# Allegro board MainBoard.brd
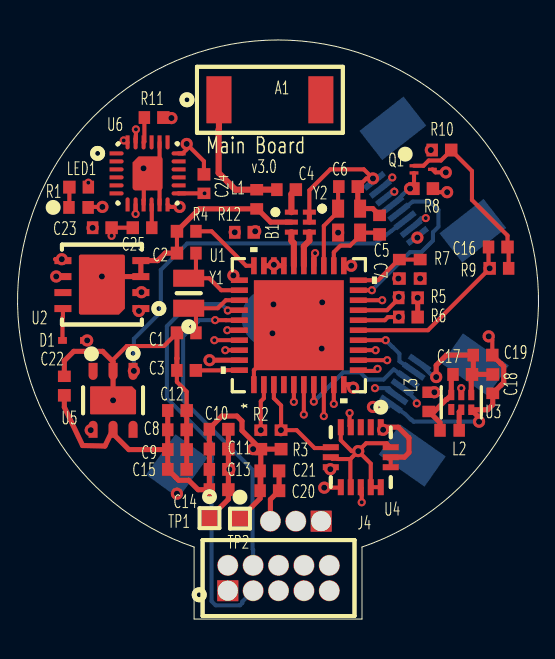
[diagram p0: board, top side]
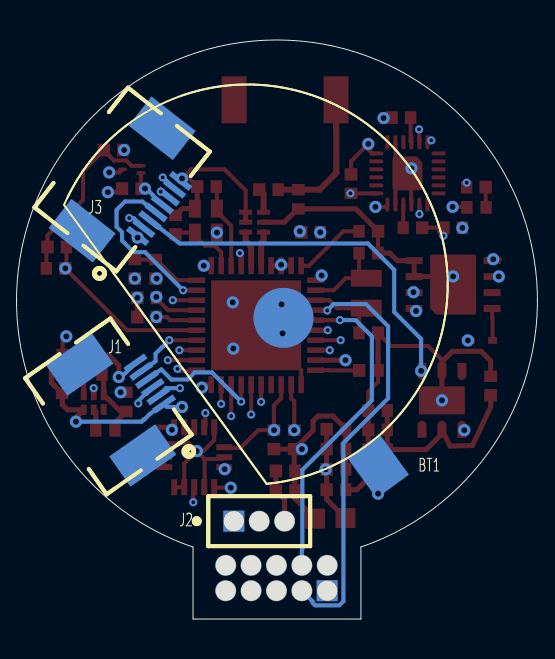
[diagram p1: board, bottom side, seen from below]

Outline 26.07 x 28.97 mm; copper layers: TOP, GND, SIGNAL1, SIGNAL2, POWER, BOTTOM. Coordinates in mm from the lower left corner of the outline.
Outline path: 8.83,3.6 8.83,0 17.23,0 17.23,3.6 arc(13.03,28.97) 8.83,3.6

## Placement (name value [footprint] x y rotation side)
A1  AN_SMD  [FR05_S1_N_0_102]  12.62 25.98 0 top
B1  Balun_LFB182G45BG2D280  [LFB182G45BG2D280]  14.15 19.86 0 top
BT1  -  [CR2032]  14.55 16.71 54 bottom
C1  22pF  [C0402]  8.43 14.32 180 top
C2  22pF  [C0402]  8.43 18.31 180 top
C3  1uF  [C0402]  8.46 12.44 0 top
C4  1.2pF_GRM1555C1H1R2CZ01D1  [C0402]  13.46 21.48 0 top
C5  12pF  [C0402]  18.11 19.7 270 top
C6  12pF  [C0402]  16.56 21.63 0 top
C7  1nF  [C0402]  19.1 17.49 270 top
C8  100nF  [C0402]  8 9.47 0 top
C9  100nF  [C0402]  8 8.48 0 top
C10  100nF  [C0402]  10.08 9.49 0 top
C11  100nF  [C0402]  10.08 8.5 0 top
C12  200pF  [C0402]  8 10.43 0 top
C13  2.2uF  [C0402]  10.08 7.49 0 top
C14  1uF  [C0402]  10.08 6.47 0 top
C15  100nF  [C0402]  8 7.49 0 top
C16  100pF  [C0402]  24.05 18.61 0 top
C17  2.2uF  [C0402]  22.28 12.24 0 top
C18  1210  [C0402]  23.77 11.78 90 top
C19  2.2uF  [C0402]  23.29 13.2 0 top
C20  CAP NP  [C0402]  12.62 6.42 0 top
C21  CAP POL  [C0402]  12.62 7.41 0 top
C22  100NF_25V_GRM155R71E103KA01D  [C0402]  2.34 11.65 270 top
C23  0.1uF+-10%,4V  [C0402]  4.24 19.58 0 top
C24  10nF+-10%,4V  [C0402]  9.32 21.79 90 top
C25  0.1uF+-10%,2V  [C0402]  6.22 19.58 180 top
D1  1N60P_LL34  [NSVR0230P2]  2.79 13.94 180 top
J1  SIM800_PORTS  [FPC_6PIN_0_5MM]  21.46 10.64 325 bottom
J2  UART  [HEADER1X3]  15.19 4.9 180 bottom
J3  SkinClosed_Ports  [FPC_8PIN_0_5MM]  20.78 21.99 38 bottom
J4  CC_Debugger  [HEADER_2X5_6]  10.52 1.42 0 top
L1  ? nH  [L0402]  11.96 21 90 top
L2  2.2uH  [L0402]  21.62 9.44 180 top
L3  LBead_BLM15HG102SN1D  [L0402]  20.57 10.86 90 top
LED1  RED  [LED0402]  3.05 20.59 0 top
NOREF  -  []  26.06 16.15 0 top
Q1  MMBT3904SL-SOT-923  [SOT923]  20.29 22.5 0 top
R1  330R  [R0402]  3.05 21.61 180 top
R2  2K2  [R0402]  12.17 8.96 270 top
R3  2K2  [R0402]  13.18 8.96 270 top
R4  56K-1%  [R0402]  8.43 19.4 180 top
R5  4.7K  [R0402]  19.56 16.07 0 top
R6  4.7K  [R0402]  19.56 15.11 0 top
R7  2K7  [R0402]  20.14 17.49 270 top
R8  20K  [R0402]  20.32 21.53 0 top
R9  4.7K  [R0402]  24.08 17.54 180 top
R10  47K  [R0402]  21.23 23.46 0 top
R11  0R  [R0402]  6.83 25.09 0 top
R12  0R  [R0402]  11.35 19.35 0 top
TP1  TP  [TP1]  9.6 5.05 0 top
TP2  TP  [TP1]  11.12 5.02 0 top
U1  CC2541-VQFN  [RHA40_4P5X4P5]  14.07 14.7 90 top
U2  MX25U1635EZUI-10G  [MX25U1635EZUI]  4.22 16.73 180 top
U3  TPS62730  [DRY6]  22.2 10.84 90 top
U4  -  [LIS3DH]  17.17 8.1 270 top
U5  -  [SHT25]  4.77 10.94 270 top
U6  -  [MPU6500]  6.5 22.29 0 top
Y1  32.768KHz  [Y_FC_12M]  8.56 16.3 90 top
Y2  32MHz  [FA-118T]  16.59 19.93 0 top

## Library data of the parts
A1 = AN_SMD_1
B1 = Balun_LFB182G45BG2D280
BT1 = BATTERY
C1-C16 = CAP-NP
C17 C19 C20 C22-C25 = CAP NP
C18 = CAP-POL
C21 = CAP POL
D1 = DIODE
J1 = HEADER 6
J2 = HEADER 3
J3 = HEADER 8
J4 = CC_Debugger
L1 L2 = L
L3 = BEAD
LED1 = LED
Q1 = NPN
R1-R12 = R
TP1 TP2 = TP
U1 = CC2541
U2 = MX25U1635EZUI-10G_0
U3 = TPS62730
U4 = LIS3DH
U5 = SHT25_0
U6 = MPU6500_0
Y1 = Crystal_2PIN
Y2 = Crystal_4PIN_US

## Footprints (pads in the part's own frame, mm; a bottom-side part is the same pattern mirrored in y, then rotated)
C0402
  rect 0.57x0.64 smd: 1(-0.49,0)
  rect 0.62x0.64 smd: 2(0.46,0)
CR2032
  rect 2.5x2 smd: 1(-11.2,0)
  round 3 smd: 2(-2.413,-0.533)
DRY6
  rect 0.55x0.3 smd: 1(-0.355,0.5)
  rect 0.52x0.3 smd: 2(-0.37,0) 3(-0.37,-0.5) 4(0.37,-0.5) 5(0.37,0) 6(0.37,0.5)
FA-118T
  rect 0.6x0.9 smd: 1(-0.55,0.6) 2(-0.55,-0.6) 3(0.55,-0.6) 4(0.55,0.6)
FPC_6PIN_0_5MM
  rect 2.8x1.85 smd: (-0.025,-2.54) (0,2.997)
  rect 1.25x0.3 smd: 1(-2.35,1.5) 2(-2.35,1) 3(-2.35,0.5) 4(-2.35,0) 5(-2.35,-0.5) 6(-2.35,-1)
FPC_8PIN_0_5MM
  rect 2.8x1.85 smd: (0,-3.251) (0,3.251)
  rect 1.25x0.3 smd: 1(-2.35,1.75) 2(-2.35,1.25) 3(-2.35,0.75) 4(-2.35,0.25) 5(-2.35,-0.25) 6(-2.35,-0.75) 7(-2.35,-1.25) 8(-2.35,-1.75)
FR05_S1_N_0_102
  rect 1.25x2.35 smd: 1(-2.55,0) 2(2.55,0)
HEADER1X3
  rect 1.05x1.05 hole 1: 1(0,0)
  round 1.05 hole 1: 2(1.27,0) 3(2.54,0)
HEADER_2X5_6
  rect 1.05x1.05 hole 1: 1(0,0)
  round 1.05 hole 1: 2(0,1.27) 3(1.27,0) 4(1.27,1.27) 5(2.54,0) 6(2.54,1.27) 7(3.81,0) 8(3.81,1.27) 9(5.08,0) 10(5.08,1.27)
L0402
  rect 0.57x0.64 smd: 1(-0.48,0) 2(0.48,0)
LED0402
  rect 0.57x0.64 smd: 1(-0.48,0) 2(0.48,0)
LFB182G45BG2D280
  rect 0.65x0.25 smd: 1(-0.45,0.5) 2(-0.45,0) 3(-0.45,-0.5) 4(0.45,-0.5) 5(0.45,0) 6(0.45,0.5)
LIS3DH
  rect 0.8x0.3 smd: 1(-1.5,1) 2(-1.5,0.5) 3(-1.5,0) 4(-1.5,-0.5) 5(-1.5,-1) 9(1.5,-1) 10(1.5,-0.5) 11(1.5,0) 12(1.5,0.5) 13(1.5,1)
  rect 0.3x0.8 smd: 6(-0.5,-1.5) 7(0,-1.5) 8(0.5,-1.5) 14(0.5,1.5) 15(0,1.5) 16(-0.5,1.5)
MPU6500
  custom 0.7x0.2 smd: 1(-1.55,1) 2(-1.55,0.6) 3(-1.55,0.2) 4(-1.55,-0.2) 5(-1.55,-0.6) 6(-1.55,-1) 13(1.55,-1) 14(1.55,-0.6) 15(1.55,-0.2) 16(1.55,0.2) 17(1.55,0.6) 18(1.55,1)
  custom 0.2x0.7 smd: 7(-1,-1.55) 8(-0.6,-1.55) 9(-0.2,-1.55) 10(0.2,-1.55) 11(0.6,-1.55) 12(1,-1.55) 19(1,1.55) 20(0.6,1.55) 21(0.2,1.55) 22(-0.2,1.55) 23(-0.6,1.55) 24(-1,1.55)
  custom 1.5x1.7 smd: 25(0,0)
MX25U1635EZUI
  rect 0.85x0.35 smd: 1(-1.95,1.2) 2(-1.95,0.4) 3(-1.95,-0.4) 4(-1.95,-1.2) 5(1.95,-1.2) 6(1.95,-0.4) 7(1.95,0.4) 8(1.95,1.2)
  custom 2.3x3 smd: 9(0,0)
NSVR0230P2
  rect 0.44x0.34 smd: 1(-0.55,0) 2(0.55,0)
R0402
  rect 0.57x0.64 smd: 1(-0.49,0)
  rect 0.62x0.64 smd: 2(0.46,0)
RHA40_4P5X4P5
  rect 0.85x0.28 smd: 1(-2.975,2.25) 2(-2.975,1.75) 3(-2.975,1.25) 4(-2.975,0.75) 5(-2.975,0.25) 6(-2.975,-0.25) 7(-2.975,-0.75) 8(-2.975,-1.25) 9(-2.975,-1.75) 10(-2.975,-2.25) 21(2.975,-2.25) 22(2.975,-1.75) 23(2.975,-1.25) 24(2.975,-0.75) 25(2.975,-0.25) 26(2.975,0.25) 27(2.975,0.75) 28(2.975,1.25) 29(2.975,1.75) 30(2.975,2.25)
  rect 0.28x0.85 smd: 11(-2.25,-2.975) 12(-1.751,-2.975) 13(-1.25,-2.975) 14(-0.75,-2.975) 15(-0.25,-2.975) 16(0.25,-2.975) 17(0.75,-2.975) 18(1.25,-2.975) 19(1.751,-2.975) 20(2.25,-2.975) 31(2.25,2.975) 32(1.751,2.975) 33(1.25,2.975) 34(0.75,2.975) 35(0.25,2.975) 36(-0.25,2.975) 37(-0.75,2.975) 38(-1.25,2.975) 39(-1.751,2.975) 40(-2.25,2.975)
  rect 4.5x4.5 smd: 41(0,0)
SHT25
  custom 0.85x0.45 smd: 1(-1.45,1) 2(-1.45,0) 3(-1.45,-1) 4(1.45,-1) 5(1.45,0) 6(1.45,1)
  custom 1.4x2.3 smd: 7(0,0)
SOT923
  rect 0.44x0.16 smd: 1(0.46,0) 2(-0.46,0.18) 3(-0.46,-0.18)
TP1
  rect 1x1 smd: 1(0,0)
Y_FC_12M
  rect 0.85x1.55 smd: 1(-0.75,0) 2(0.75,0)

## Nets
DGND: B1.2 B1.5 B1.6 BT1.2(-) C1.2 C2.2 C3.1 C5.1 C6.2 C7.2 C8.2 C9.2 C10.2 C11.2 C12.2 C13.2 C14.2 C15.2 C17.2 C18.2 C19.1 C20.2 C21.2 C22.1 C23.2 C24.2 C25.2 J1.6 J2.3 J3.8 J4.1(GND) L1.1 Q1.1(EMITTER) R4.2 R10.1 TP1.1 U1.1(GND#1) U1.41(GND#41) U2.3(/WP) U2.4(GND) U2.9(DGND) U3.4(GND) U4.5(GND#5) U4.7(SDO/SA0) U4.10(RES) U4.12(GND#12) U4.13(ADC3) U4.16(ADC1) U5.2(GND) U5.7(DGND) U6.9(AD0) U6.11(FSYNG) U6.18(GND#18) U6.20(RESV1) U6.25(GND#25) Y2.2 Y2.4
BAT_ADC: BT1.1(+) C18.1 C19.2 J1.1 U1.18(P0_1) U3.3(VIN)
CC2541_RF_N: B1.3 U1.26(RF_N)
CC2541_RF_P: B1.4 U1.25(RF_P)
CC2541_SCL: J3.2 R2.1 U1.2(SCL) U4.4(SCL/SPE) U5.4(SCL) U6.23(SCL)
CC2541_SDA: J3.3 R3.1 U1.3(SDA) U4.6(SDA) U5.1(SDA) U6.24(SDA)
DC: J4.3(DC) U1.34(P2_2/DC)
DC_P0_7: U1.12(P0_7) U3.5(BYP)
DD: J4.4(DD) U1.35(P2_1/DD)
LIS3DH_INT1: U1.9(P1_1) U4.11(INT1)
LIS3DH_INT2: U1.8(P1_2) U4.9(INT2)
LTC_CS: J1.4 U1.7(P1_3)
MISO: U1.37(P1_7) U2.2(SO)
MOSI: U1.38(P1_6) U2.5(SI)
MPU6500_CS: C16.1 R9.2 R11.2 U1.15(P0_4)
MPU6500_INT: J1.5 R12.2 U1.14(P0_5)
NRST: J4.7(NRST) R7.2
P0_0/AD0: J3.4 U1.19(P0_0)
P0_2/AD2: J1.3 J2.1 R5.1 U1.17(P0_2)
P0_3/AD3: J1.2 J2.2 R6.1 U1.16(P0_3)
P0_6/AD6: J3.7 U1.13(P0_6)
P1_0: J3.6 U1.11(P1_0)
P2_0: LED1.2(CATHODE) U1.36(P2_0)
REG_VDD: C8.1 C9.1 C10.1 C11.1 C12.1 C13.1 C14.1 C15.1 C20.1 C21.1 C22.2 C23.1 C24.1 D1.1(A) J3.1 J4.2(VCC) L3.2 R1.1 R2.2 R3.2 R5.2 R6.2 R8.2 TP2.1 U1.10(DVDD2) U1.21(AVDD5) U1.24(AVDD3) U1.27(AVDD2) U1.28(AVDD1) U1.29(AVDD4) U1.31(AVDD6) U1.39(DVDD1) U4.1(VDD_IO) U4.8(CS) U4.14(VDD) U4.15(ADC2) U5.5(VDD) U6.8(VDDIO) U6.13(VDD)
SCK: U1.5(P1_5) U2.6(SCLK)
SSN: U1.6(P1_4) U2.1(/CS)
VMCP: J3.5 Q1.3(COLLECTOR) R8.1
N12835: C1.1 U1.33(P2_3/OSC32K_Q2) Y1.1
N12841: C2.1 U1.32(P2_4/OSC32K_Q1) Y1.2
N13149: R4.1 U1.30(RBIAS)
N13333: C3.2 U1.40(DCOUPL)
N14357: C6.1 U1.23(XOSC_Q2) Y2.1
N14367: C5.2 U1.22(XOSC_Q1) Y2.3
N19377: C7.1 R7.1 U1.20(RST_N)
N42338: B1.1 C4.2
N42343: A1.1(ANT) C4.1 L1.2
N157847: C17.1 L2.2 L3.1 U3.6(VOUT)
N158007: L2.1 U3.2(SW)
N177102: C16.2 Q1.2(BASE) R9.1 R10.2
N187935: D1.2(K) U2.8(VCC)
N188720: LED1.1(ANODE) R1.2
N211658: C25.1 U6.10(REGOUT)
N212097: R11.1 U6.22(NCS)
N212301: R12.1 U6.12(INT)

Pads without a net: A1 2; J4 5 6 8 9 10; U1 4; U2 7; U3 1; U4 2 3; U5 3 6; U6 1 2 3 4 5 6 7 14 15 16 17 19 21

## Via types
v1: diameter 0.61, hole 0.305, TOP to BOTTOM, 53 vias
v2: diameter 0.406, hole 0.203, TOP to BOTTOM, 31 vias

## Routing (per net, layer and track width the routed paths; a pad name or vN(x,y) marks a point on that pad's centre or on a via; arc(x,y) is an arc through that point)
DGND: length 88.9
  TOP w0.203: U6.25 6.3,22.09 6.3,21.63 6.31,21.62 6.31,20.97 6.3,20.96 U6.9 ; U6.25 6.5,22.35 v1(6.3,22.55) ; U6.25 7.1,22.89 U6.20 ; U6.25 7.1,21.69 U6.11 ; 16.65,8.01 v1(17.04,8.4) ; 16.65,8.01 16.65,6.62 U4.10 ; 16.65,8.01 16.02,8.01 16.01,8.02 15.75,8.02 U4.7 ; v1(17.04,8.4) 17.67,7.77 U4.12 U4.13 ; v1(17.04,8.4) 16.71,8.4 16.17,8.94 U4.5 ; v1(17.04,8.4) 17.44,8.8 18.47,8.8 U4.16 ; U1.1 11.82,12.45 U1.41 ; v1(15.24,15.84) 14.1,14.7 U1.41 ; v1(12.75,14.29) 13.16,14.7 U1.41 ; v1(12.8,15.74) 13.03,15.74 U1.41 ; B1.6 14.6,21.45 15.65,22.5 17.32,22.5 v1(17.78,22.04) 17.45,22.04 17.04,21.63 C6.2 ; U1.41 14.07,14.67 v1(15.21,13.53) ; C24.2 9.32,22.9 v1(8.46,23.77) 8.46,23.5 8.26,23.29 U6.18 ; 7.97,14.31 7.32,13.66 5.46,13.66 4.77,12.97 4.77,12.87 ; C2.2 R4.2 ; C25.2 C23.2 v2(4.7,19.17) ; R10.1 v1(20.68,23.46) ; C13.2 v1(10.59,7.49) ; C3.1 7.97,11.87 8.46,11.37 C12.2 ; Q1.1 20.91,22.35 v1(21.43,22.35) ; C7.2 v1(19.05,17.03) ; U2.9 v1(4.22,17.14)
  TOP w0.254: v1(20.94,12.11) 20.94,12.69 21.46,13.2 C19.1 22.8,12.3 22.74,12.24 ; U2.9 4.62,17.13 U2.3 U2.4 7.01,17.93 7.38,18.31 C2.2 ; R4.2 7.97,19.41 9.08,20.52 L1.1 12,20.52 12.66,19.86 B1.2 ; C1.2 7.97,13.04 7.97,13.04 C3.1 ; C10.2 C11.2 C13.2 C14.2 10.54,5.99 TP1.1 ; C18.2 22.74,12.24 ; 22.74,12.24 C17.2 22.7,12.2 U3.4 ; 12.65,4.9 12.65,5.99 C20.2 C21.2 ; C15.2 C9.2 C8.2 C12.2 ; B1.5 B1.6 ; v1(4.77,10.94) U5.2 4.77,12.87 4.25,13.39 2.81,13.39 2.34,12.92 C22.1 ; C5.1 17.77,20.53 Y2.4 17.02,20.65 C6.2
  GND w0.203: 12.65,4.9 12.65,5.67 ; 12.65,4.9 12.65,4.12 ; 12.65,4.9 11.87,4.9 ; v1(12.8,15.74) 15.21,15.74 ; 9.74,1.42 J4.1 10.52,0.64
  BOTTOM w0.203: v1(17.78,22.04) 17.78,21.99 J3.8 ; J1.6 20.81,12.11 v1(20.94,12.11)
  vias: v1(16.04,19.33)
BAT_ADC: length 32.5
  TOP w0.203: U1.18 v2(18.24,15.95) ; v1(23.57,14.14) 23.75,13.96 C19.2
  TOP w0.254: v1(23.09,9.87) 23.09,10.08 U3.3 23.52,10.47 23.77,10.72 C18.1 24.19,11.7 24.19,11.7 24.32,11.83 24.32,12.64 24.19,12.78 24.18,12.78 C19.2
  SIGNAL1 w0.203: v1(23.57,14.14) 19,14.14 18.24,14.9 v2(18.24,15.95)
  SIGNAL1 w0.254: v1(17.78,10.61) 13.44,6.27 v1(7.97,6.27)
  BOTTOM w0.203: v1(17.78,10.61) 18.53,10.61 J1.1 19.4,10.25 19.67,9.98 19.71,9.98 19.81,9.87 v1(23.09,9.87)
  BOTTOM w0.254: BT1.1 v1(7.97,6.27)
CC2541_RF_N: length 1.7
  TOP w0.305: U1.26 13.82,18.8 13.7,18.93 B1.3
CC2541_RF_P: length 1.8
  TOP w0.305: B1.4 14.6,18.93 14.32,18.65 U1.25
CC2541_SCL: length 55.3
  TOP w0.203: U4.4 16.61,9.65 v2(16.61,10.31) ; U1.2 12.32,11.05 12.17,10.89 v1(12.17,9.45) ; U6.23 5.9,24.02 5.92,24.04 v2(5.92,24.5)
  SIGNAL1 w0.203: v1(3.66,9.45) v1(12.17,9.45) 12.17,8.88 12.65,8.4 14.71,8.4 v2(16.61,10.31)
  SIGNAL2 w0.203: v1(3.66,9.45) 3.66,10.59 2.26,11.98 2.26,13.53 1.12,14.67 1.12,18.43 2.03,19.35 2.06,19.35 4.04,21.33 4.04,23.59 4.95,24.5 v2(5.92,24.5) ; v2(20.42,20.06) 20.74,19.74 20.95,19.74 22.76,17.93 22.76,11.45 20.27,8.96 17.96,8.96 v2(16.61,10.31)
  BOTTOM w0.203: J3.2 20.2,20.06 v2(20.42,20.06)
CC2541_SDA: length 48.3
  TOP w0.203: U6.24 5.41,23.84 v2(5.31,23.95) ; R3.1 v1(13.18,9.45) ; R3.1 13.18,10.68 12.82,11.05 U1.3 ; R3.1 13.96,9.45 14.86,8.55 15.63,8.55 U4.6
  SIGNAL1 w0.203: v2(5.31,23.95) 4.17,22.8 4.17,21.76 1.24,18.84 1.24,16.68 1.8,16.12 2.23,16.12 5.42,12.94 5.42,12.81 v1(5.82,12.41) 7.67,10.56 12.06,10.56 v1(13.18,9.45)
  BOTTOM w0.203: J3.3 17.9,18.79 8.48,18.79 7.16,17.47 7.16,15.36 5.82,14.01 v1(5.82,12.41)
DC: length 21.4
  TOP w0.203: U1.34 v2(10.52,15.44)
  BOTTOM w0.203: v2(10.52,15.44) 10.19,15.76 8.58,15.76 7.47,14.65 7.47,11.04 9.7,8.81 9.7,8.18 9.73,8.02 9.7,7.98 9.7,0.89 9.91,0.69 11.12,0.69 11.24,0.81 11.24,0.87 J4.3
DC_P0_7: length 6.1
  TOP w0.203: U1.12 v2(18.49,12.95) ; v2(22.2,11.55) U3.5
  SIGNAL1 w0.203: v2(18.49,12.95) 20.8,12.95 21.14,12.61 21.15,12.61 21.45,12.32 21.45,12.3 v2(22.2,11.55)
DD: length 16.1
  TOP w0.203: U1.35 10.42,14.95 v2(9.88,14.95)
  BOTTOM w0.203: J4.4 11.79,3.46 11.76,3.49 11.76,7.46 8.28,10.94 8.28,14.14 9.09,14.95 v2(9.88,14.95)
LIS3DH_INT1: length 7.2
  TOP w0.203: U1.9 v2(15.82,10.76) ; v2(17.22,5.84) 17.22,6.19 17.21,6.2 17.21,6.56 U4.11
  SIGNAL2 w0.203: v2(17.22,5.84) 16.89,6.16 16.89,7.31 15.82,8.38 v2(15.82,10.76)
LIS3DH_INT2: length 6.4
  TOP w0.203: U4.9 16.15,6.57 v1(15.34,6.57) ; U1.8 v2(15.32,10.15)
  SIGNAL2 w0.203: v1(15.34,6.57) 14.88,7.03 14.88,9.72 v2(15.32,10.15)
LTC_CS: length 6.7
  TOP w0.203: U1.7 v2(14.82,10.88)
  BOTTOM w0.203: J1.4 18.82,12.49 18.31,11.98 17.5,11.98 17.14,12.34 16.28,12.34 v2(14.82,10.88)
MISO: length 5.9
  TOP w0.203: U1.37 v2(9.84,13.95)
  SIGNAL1 w0.203: v2(9.84,13.95) 7.44,16.35 v1(6.2,16.35)
MOSI: length 11.5
  TOP w0.203: v1(2.21,18) 1.88,18 U2.5 ; U1.38 v2(10.39,13.45)
  SIGNAL1 w0.203: v1(2.21,18) 6.76,13.45 9.38,13.45 9.39,13.46 9.81,13.46 9.82,13.45 v2(10.39,13.45)
MPU6500_CS: length 35.7
  TOP w0.203: R11.2 7.19,25.06 v1(7.7,25.06) ; U1.15 20.53,14.45 23.62,17.53 v1(23.62,17.54) 23.56,17.6 C16.1
  SIGNAL1 w0.203: v1(23.62,17.54) 23.62,21.66 20.93,24.35 19,24.35 15.52,20.87 8.79,20.87 7.7,21.96 v1(7.7,25.06)
MPU6500_INT: length 24.5
  TOP w0.203: U1.14 v2(18.41,13.95)
  SIGNAL2 w0.203: v1(11.89,19.4) 15.27,22.78 20.04,22.78 20.6,22.22 20.6,21.13 18.85,19.37 18.85,18.33 17.12,16.6 17.12,14.7 17.87,13.95 v2(18.41,13.95)
  BOTTOM w0.203: J1.5 19.1,12.9 19.1,13.27 18.77,13.61 18.76,13.61 v2(18.41,13.95)
NRST: length 25
  TOP w0.203: R7.2 v1(20.14,17.03)
  SIGNAL1 w0.203: J4.7 15.1,0.64 15.92,0.64 16.41,1.13 16.41,4.03 24.26,11.88 24.26,15.59 22.81,17.03 v1(20.14,17.03)
P0_0/AD0: length 8.7
  TOP w0.203: U1.19 v2(17.73,16.45)
  BOTTOM w0.203: J3.4 19.77,20.89 20.64,20.89 21.06,20.47 21.06,19.63 20.78,19.35 20.78,18.93 20.21,18.36 19.63,18.36 v2(17.73,16.45)
P0_2/AD2: length 17.5
  TOP w0.203: v1(19.07,16.12) R5.1 19.07,16.04 18.48,15.45 U1.17
  SIGNAL1 w0.203: J2.1 15.57,4.9 20.01,9.34 20.01,10.29 19.97,10.33 v2(19.97,10.79)
  SIGNAL2 w0.203: v2(19.97,10.79) 19.97,11.25 20.04,11.31 20.04,11.35 20.11,11.42 20.11,11.52 20.19,11.59 20.19,15 v1(19.07,16.12)
  BOTTOM w0.203: v2(19.97,10.79) 19.97,10.91 19.61,11.27 19.55,11.27 J1.3
P0_3/AD3: length 18.3
  TOP w0.203: v1(19.07,15.11) R6.1 18.53,15.11 18.37,14.95 U1.16
  SIGNAL1 w0.203: v2(17.88,11.55) 19.15,10.28 19.15,9.19 15.85,5.89 14.08,5.89 13.92,5.72 J2.2
  SIGNAL2 w0.203: v1(19.07,15.11) 19.07,11.92 18.69,11.55 v2(17.88,11.55)
  BOTTOM w0.203: J1.2 18.58,11.55 v2(17.88,11.55)
P0_6/AD6: length 12
  TOP w0.203: U1.13 v2(17.91,13.45)
  SIGNAL2 w0.203: v2(18.74,22.09) 18.26,21.61 18.26,18.26 16.64,16.63 16.64,14.22 17.4,13.45 v2(17.91,13.45)
  BOTTOM w0.203: J3.7 18.72,22.09 v2(18.74,22.09)
P1_0: length 12.2
  TOP w0.203: v2(18.01,12.52) 17.91,12.41 17.08,12.41 U1.11
  SIGNAL1 w0.203: v2(18.01,12.52) 17.35,12.52 16.74,13.13 16.74,16.48 17.88,17.62 17.88,20.41 v2(18.85,21.38)
  BOTTOM w0.203: v2(18.85,21.38) 18.71,21.38 J3.6
P2_0: length 11.1
  TOP w0.203: LED1.2 3.55,20.62 v1(4.24,20.62) ; U1.36 v2(10.49,14.45)
  SIGNAL2 w0.203: v1(4.24,20.62) 4.24,20.41 7.19,17.47 7.19,15.97 8.71,14.45 v2(10.49,14.45)
REG_VDD: length 41.1
  TOP w0.203: C23.1 v1(3.75,19.57) ; v1(21.49,21.35) 20.96,21.35 R8.2 ; v1(15.65,7.5) 15.65,7.57 U4.8 ; U6.8 v2(5.9,20.26) ; R1.1 v2(3.54,21.83) ; 12.16,8.5 v1(11.78,8.5) ; D1.1 v1(3.48,13.94) ; L3.2 v1(20.85,11.34) ; U4.15 U4.14 ; U6.13 8.05,21.3 C24.1 v2(9.35,21.3)
  TOP w0.254: C9.1 C8.1 C12.1 ; C9.1 5.56,8.48 4.77,9.26 U5.5 4.37,8.65 3.25,8.68 2.34,10.6 C22.2 ; C9.1 C15.1 7.92,7.08 7.92,7.07 8.06,6.94 8.56,6.94 9.03,6.47 C14.1 C13.1 C11.1 C10.1 9.59,9.53 10.22,10.15 10.97,10.15 11.23,9.9 11.23,9.43 12.16,8.5 R2.2 ; C21.1 C20.1 ; C20.1 12.13,6.03 TP2.1 ; C20.1 12.17,6.45 R2.2 ; v2(14.88,18.31) 14.82,18.24 U1.24 ; R2.2 R3.2 ; v1(16.79,11.58) 16.64,11.72 U1.10 ; U1.29 U1.28 ; U1.28 U1.27 ; U1.28 v1(12.82,17.72) ; v1(10.79,17.19) 11.03,16.95 U1.31 ; v1(18.29,9.47) 18.17,9.59 U4.1 19.05,9.6 19.58,9.06 19.58,8.33 19.35,8.1 U4.15 ; v1(20.02,16.07) R6.2 ; U1.39 v1(9.6,12.95) ; U1.21 v1(16.69,17.68)
  POWER w0.203: 9.74,2.69 J4.2 10.52,3.46
  BOTTOM w0.254: J3.1 v1(20,19.08)
SCK: length 15.4
  TOP w0.203: U1.5 v2(13.82,10.86)
  SIGNAL2 w0.203: v2(13.82,10.86) 8.36,10.86 2.29,16.94 2.13,16.94 v1(1.93,17.14)
SSN: length 12.9
  TOP w0.203: U1.6 v2(14.32,10.23)
  SIGNAL2 w0.203: v2(14.32,10.23) 14.32,11.35 13.92,11.75 9.17,11.75 6.07,14.85 v1(6.07,15.41)
VMCP: length 2.2
  TOP w0.203: v1(19.63,21.53) R8.1 19.83,21.54 Q1.3
  BOTTOM w0.203: J3.5 19.01,20.97 19.01,20.97 19.25,21.21 19.25,21.22 19.56,21.53 v1(19.63,21.53)
N12835: length 4.1
  TOP w0.203: U1.33 10.42,15.95 10.02,15.55 Y1.1 8.92,15.19 C1.1
N12841: length 4.2
  TOP w0.203: U1.32 10.19,16.45 9.59,17.05 Y1.2 8.92,17.41 C2.1
N13149: length 3.6
  TOP w0.203: U1.30 11.43,17.68 9.7,19.4 R4.1
N13333: length 2.2
  TOP w0.203: C3.2 10.41,12.44 10.42,12.45 U1.40
N14357: length 4.3
  TOP w0.203: C6.1 16.04,21.6 Y2.1 16.04,20.38 15.32,19.67 U1.23
N14367: length 3.5
  TOP w0.203: C5.2 18.02,19.33 Y2.3 17.14,19.18 16.63,18.68 16.15,18.68 15.82,18.35 U1.22
N19377: length 3.5
  TOP w0.203: R7.1 C7.1 19.07,17.98 18.03,16.95 U1.20
N42338: length 1.2
  TOP w0.305: C4.2 13.7,21.26 B1.1
N42343: length 6.9
  TOP w0.305: A1.1 10.07,24.5 10.06,24.48 10.06,22.32 10.9,21.48 L1.2 11.97,21.48 C4.1
N157847: length 3.7
  TOP w0.254: C17.1 21.7,12.15 U3.6 21.48,10.99 21.45,10.99 20.85,10.38 L3.1 21.14,9.82 L2.2
N158007: length 1.1
  TOP w0.254: U3.2 22.1,10.36 L2.1
N177102: length 9.3
  TOP w0.203: Q1.2 20.31,22.68 20.57,22.94 21.18,22.94 21.69,23.45 ; 21.69,23.45 R10.2 ; 21.69,23.45 22.73,22.41 22.73,20.97 24.51,19.19 C16.2 24.57,18.56 R9.1
N187935: length 1.6
  TOP w0.203: U2.8 2.27,15.1 2.24,15.08 D1.2
N188720: length 1
  TOP w0.203: R1.2 2.59,20.61 LED1.1
N211658: length 1.2
  TOP w0.203: U6.10 6.71,20.73 C25.1
N212097: length 1.3
  TOP w0.203: U6.22 6.34,23.88 R11.1
N212301: length 4.3
  TOP w0.203: U6.12 7.63,20.62 v1(8.1,20.62)
  SIGNAL1 w0.203: v1(8.1,20.62) 8.1,20.06 8.81,19.35 v1(10.86,19.35)

## Copper pours and planes (outline as drawn; the poured copper is in the pictures)
DGND on GND: 9.37,0.53 9.37,3.99 13.03,28.44 16.7,3.99 16.7,0.53
REG_VDD on POWER: 9.37,0.53 9.37,3.99 13.03,28.44 16.7,3.99 16.7,0.53

## Text on the board
Ref Des/Silkscreen Top: v3.0 | Main Board
PLACE_BOUND_TOP: FIGURE | SIZE | 8.0 | 12.0 | 39.37 | DRILL CHART: TOP to BOTTOM | ALL UNITS ARE IN MILS | PLATED | QTY | 31 | 53 | 13
